# Altium PCB PCB.PcbDoc (part 2 of 2)
Units mm, origin at the board's own origin, x right, y up, seen from the top; angles counter-clockwise.
Board outline 53.59 x 68.71 mm, 2 copper layers (Top Layer, Bottom Layer), stack 1.571 mm thick; 66 components, 64 nets, 259 pads, 241 vias.
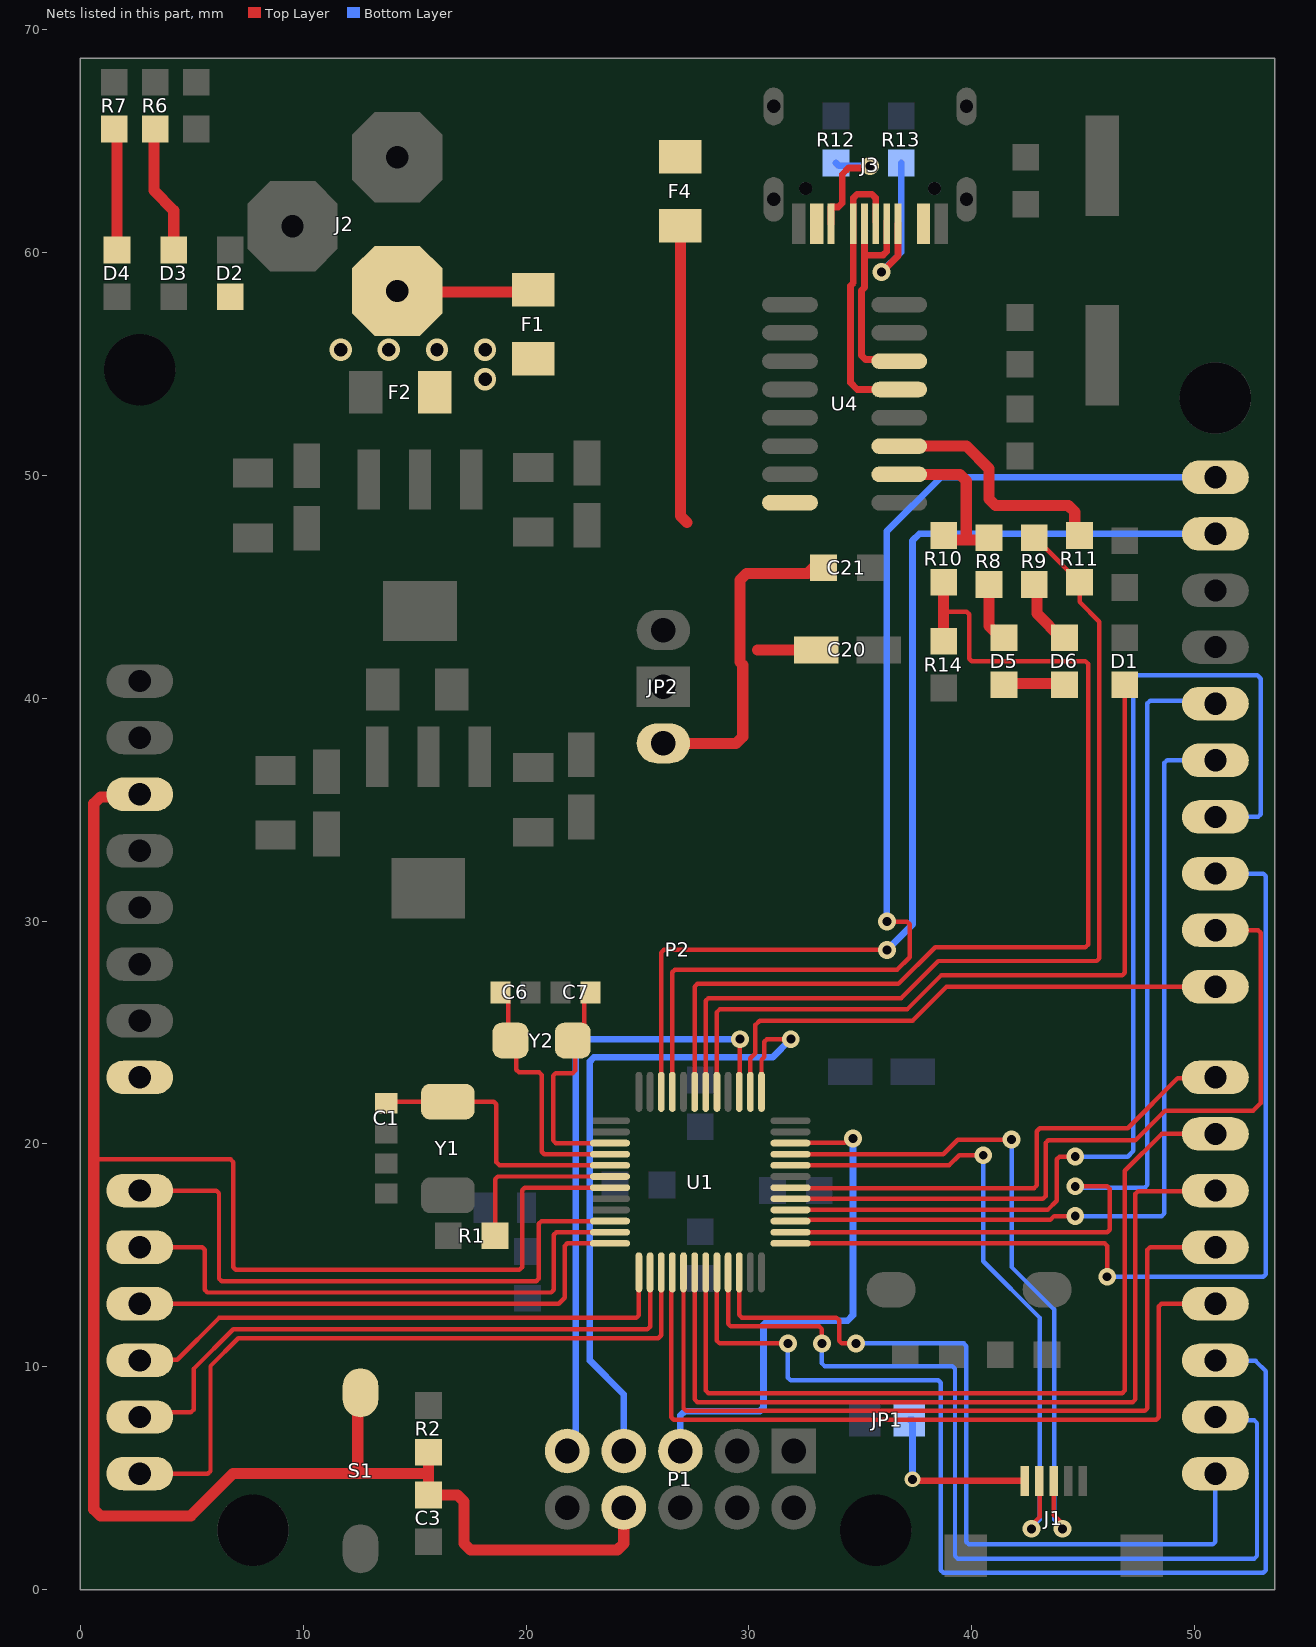
[diagram p2: the nets of this part, all layers, seen from the top]

## Via types
v1: diameter 0.8, hole 0.5, Top Layer to Bottom Layer, tented both sides, 129 vias
v2: diameter 1, hole 0.6, Top Layer to Bottom Layer, tented both sides, 63 vias
v3: diameter 0.7, hole 0.4, Top Layer to Bottom Layer, tented both sides, 26 vias
v4: diameter 0.8, hole 0.4, Top Layer to Bottom Layer, tented both sides, 21 vias
v5: diameter 0.8, hole 0.8, Top Layer to Bottom Layer, tented both sides, 2 vias

## Nets (pads, with @x,y where several pads share a name; then routed paths per layer and width w, separated by ;. In a path a pad name is that pad's centre, name@x,y a point inside that pad or via, vN(x,y) a via of type N, cw(c..) or ccw(c..) an arc to the next point about the centre after c; other vN are vias at no path point) (continued)
NetD3_2: D3.2 R6.2 | length 5.8
  Top Layer w0.5: R6.2@3.302,65.537 3.302,62.772 4.191,61.883 D3.2@4.191,60.105
NetD4_2: D4.2 R7.2 | length 5.5
  Top Layer w0.5: R7.2@1.524,65.532 1.651,65.405 D4.2@1.651,60.055
NetD5_2: D5.2 R8.2 | length 2.8
  Top Layer w0.5: R8.2@40.767,45.099 40.767,44.963 40.767,43.233 41.344,42.656 D5.2@41.444,42.656
NetD6_2: D6.2 R9.2 | length 2.9
  Top Layer w0.5: R9.2@42.799,44.963 42.915,44.847 42.915,43.794 44.054,42.656 D6.2@44.154,42.656
NetF1_1: F1.1 J2.1 | length 6.1
  Top Layer w0.5: J2.1@14.224,58.271 14.28,58.215 20.274,58.215 F1.1@20.32,58.169
NetF4_1: F4.1 J3.A4_B9 J3.B4_A9
NetJ1_1: J1.1 JP1.1 | length 7.9
  Top Layer w0.3: v3(37.338,4.953) 37.338,4.882 J1.1@42.375,4.882
  Bottom Layer w0.3: JP1.1@37.195,7.62 37.338,7.62 v3(37.338,4.953)
NetJ3_A5: J3.A5 R13.2 | length 7.8
  Top Layer w0.3: v4(35.941,59.116) 35.964,59.116 36.683,59.834 J3.A5@36.683,61.284
  Bottom Layer w0.3: v4(35.941,59.116) 36.83,60.005 R13.2@36.83,64.013
NetJ3_A6: J3.A6 J3.B6 U4.5 | length 12.8
  Top Layer w0.3: J3.A6@35.683,61.384 35.683,62.435 35.507,62.611 34.859,62.611 34.683,62.435 34.683,58.631 34.552,58.5 34.552,54.155 34.859,53.848 U4.5@36.74,53.848
NetJ3_A7: J3.A7 J3.B7 U4.6 | length 10.3
  Top Layer w0.3: J3.A7@35.183,61.384 35.183,59.866 ; 35.993,59.866 35.183,59.866 ; 35.994,59.866 35.997,59.867 36,59.868 36.004,59.87 36.009,59.873 36.016,59.877 36.025,59.884 36.04,59.898 36.183,60.041 J3.B7@36.183,61.384 ; U4.6@36.74,55.118 36.663,55.195 35.228,55.195 35.052,55.37 35.052,58.293 35.183,58.424 35.183,59.866
NetJ3_B5: J3.B5 R12.2 | length 5.6
  Top Layer w0.3: J3.B5@33.683,61.284 33.683,62.034 34.007,62.034 34.183,62.209 34.183,63.503 34.466,63.785 35.337,63.785 v4(35.433,63.881)
  Bottom Layer w0.3: R12.2@33.909,64.013 34.041,63.881 v4(35.433,63.881)
NetR8_1: R8.1 R10.1 U4.2 | length 7.8
  Top Layer w0.5: U4.2@36.74,50.038 37.344,50.038 39.458,50.038 39.751,49.745 39.751,47.101 ; R10.1@38.735,47.101 39.751,47.101 ; R8.1@40.767,47.101 39.751,47.101
NetR11_1: R11.1 U4.3 | length 11
  Top Layer w0.5: U4.3@36.74,51.308 37.344,51.308 39.751,51.308 40.767,50.292 40.767,48.934 41.06,48.641 44.325,48.641 44.617,48.348 44.617,47.515 R11.1@44.831,47.301
OSC32_IN: C6.1 U1.4 Y2.1 | length 11.6
  Top Layer w0.2: C6.1@18.843,26.797 19.193,26.447 19.193,24.746 19.565,24.374 19.565,23.327 19.682,23.21 20.584,23.21 20.701,23.093 20.701,19.655 20.818,19.538 U1.4@23.763,19.538
OSC32_OUT: C7.1 U1.3 Y2.2 | length 10.5
  Top Layer w0.2: C7.1@22.9,26.797 22.606,26.503 22.606,25.143 Y2.2@22.101,24.638 22.215,24.524 22.215,23.295 22.098,23.178 21.326,23.178 21.209,23.06 21.209,20.155 21.326,20.038 U1.3@23.763,20.038
OSC_IN: C1.1 U1.5 Y1.1 | length 12.8
  Top Layer w0.2: C1.1@13.73,21.826 13.8,21.896 Y1.1@16.489,21.896 18.552,21.896 18.669,21.779 18.669,19.177 18.808,19.038 U1.5@23.763,19.038
OSC_OUT: R1.1 U1.6 | length 7.7
  Top Layer w0.2: R1.1@18.61,15.875 18.61,18.421 18.727,18.538 U1.6@23.763,18.538
PA0: P2.AD1 U1.10 | length 27.6
  Top Layer w0.2: P2.AD1@2.667,17.907 6.106,17.907 6.223,17.79 6.223,13.96 6.34,13.843 20.457,13.843 20.574,13.96 20.574,16.421 20.691,16.538 U1.10@23.763,16.538
PA1: P2.AD2 U1.11 | length 25.6
  Top Layer w0.2: P2.AD2@2.667,15.367 5.471,15.367 5.588,15.25 5.588,13.452 5.705,13.335 21.128,13.335 21.245,13.452 21.245,15.921 21.362,16.038 U1.11@23.763,16.038
PA2: P2.AD3 U1.12 | length 23.6
  Top Layer w0.2: P2.AD3@2.667,12.827 21.463,12.827 21.73,13.094 21.73,15.421 21.847,15.538 U1.12@23.763,15.538
PA3: P2.AD4 U1.13 | length 25.2
  Top Layer w0.2: P2.AD4@2.667,10.287 2.699,10.319 4.35,10.319 6.223,12.192 24.946,12.192 25.063,12.309 U1.13@25.063,14.238
PA4: P2.AD5 U1.14 | length 28.1
  Top Layer w0.2: P2.AD5@2.667,7.747 2.886,7.966 4.963,7.966 5.08,8.083 5.08,9.906 6.858,11.684 25.446,11.684 25.563,11.801 U1.14@25.563,14.238
PA5: P2.AD6 U1.15 | length 31.5
  Top Layer w0.2: P2.AD6@2.667,5.207 5.725,5.207 5.842,5.324 5.842,10.033 7.093,11.284 25.927,11.284 26.063,11.42 U1.15@26.063,14.238
PA6: P2.IOL4 U1.16 | length 36.1
  Top Layer w0.2: U1.16@26.563,14.238 26.563,13.461 26.513,13.411 26.513,7.737 26.63,7.62 48.27,7.62 48.387,7.737 48.387,12.71 48.504,12.827 P2.IOL4@50.927,12.827
PA7: P2.IOL5 U1.17 | length 37.2
  Top Layer w0.2: U1.17@27.063,14.238 27.063,8.137 27.18,8.02 47.762,8.02 47.879,8.137 47.879,15.25 47.996,15.367 P2.IOL5@50.927,15.367
PA8: P2.IOH2 U1.29 | length 34
  Top Layer w0.2: U1.29@31.863,17.538 43.19,17.538 43.307,17.655 43.307,20.046 43.424,20.163 47.341,20.163 48.675,21.497 52.622,21.497 52.959,21.834 52.959,29.474 52.842,29.591 P2.IOH2@50.927,29.591
PA9: P2.IOL8 U1.30 | length 22.5
  Top Layer w0.2: U1.30@31.898,18.019 42.79,18.019 42.907,18.136 42.907,20.565 43.043,20.701 46.99,20.701 49.244,22.955 50.895,22.955 P2.IOL8@50.927,22.987
PA15: P2.IOH1 U1.38 | length 24.4
  Top Layer w0.2: U1.38@30.063,22.338 30.063,23.84 30.291,24.068 30.291,25.338 30.48,25.527 37.338,25.527 38.862,27.051 P2.IOH1@50.927,27.051
PB0: P2.IOL6 U1.18 | length 38.4
  Top Layer w0.2: U1.18@27.563,14.238 27.563,8.537 27.68,8.42 47.222,8.42 47.339,8.537 47.339,17.758 47.456,17.875 50.895,17.875 P2.IOL6@50.927,17.907
PB1: P2.IOL7 U1.19 | length 38.8
  Top Layer w0.2: U1.19@28.063,14.238 28.063,8.937 28.18,8.82 46.746,8.82 46.863,8.937 46.863,18.796 48.514,20.447 P2.IOL7@50.927,20.447
PB2: P2.IOL3 U1.20 | length 49.3
  Top Layer w0.2: U1.20@28.563,14.238 28.563,11.166 28.68,11.049 v4(31.75,11.049)
  Bottom Layer w0.2: v4(31.75,11.049) 31.75,9.515 31.867,9.398 38.491,9.398 38.608,9.281 38.608,0.879 38.725,0.762 53.077,0.762 53.194,0.879 53.194,9.798 52.727,10.265 50.949,10.265 P2.IOL3@50.927,10.287
PB5: D1.1 U1.41 | length 35.5
  Top Layer w0.2: U1.41@28.563,22.338 28.563,25.918 28.68,26.035 37.094,26.035 38.618,27.559 46.746,27.559 46.863,27.676 D1.1@46.863,40.606
PB6: R9.1 R11.2 U1.42 | length 42.6
  Top Layer w0.2: U1.42@28.063,22.338 28.063,26.426 28.18,26.543 36.83,26.543 38.493,28.206 45.603,28.206 45.72,28.323 45.72,43.434 44.831,44.323 R11.2@44.831,45.201 43.333,46.699 43.299,46.699 R9.1@42.799,47.199
PB7: R10.2 R14.2 U1.43 | length 47
  Top Layer w0.2: U1.43@27.563,22.338 27.563,27.061 27.68,27.178 36.703,27.178 38.354,28.829 45.095,28.829 45.212,28.946 45.212,41.539 45.095,41.656 39.995,41.656 39.878,41.773 39.878,43.761 39.761,43.878 38.735,43.878
  Top Layer w0.5: R14.2@38.735,42.556 38.735,43.878 R10.2@38.735,45.201
PB8: P2.IOH10 U1.45 | length 52.1
  Top Layer w0.2: U1.45@26.563,22.338 26.563,27.696 26.68,27.813 36.645,27.813 37.211,28.379 37.211,29.855 37.094,29.972 v4(36.195,29.972)
  Bottom Layer w0.3: v4(36.195,29.972) 36.178,29.989 36.178,47.481 38.608,49.911 P2.IOH10@50.927,49.911
PB9: P2.IOH9 U1.46 | length 49
  Top Layer w0.2: U1.46@26.063,22.338 26.063,28.585 26.18,28.702 v4(36.195,28.702)
  Bottom Layer w0.3: v4(36.195,28.702) 37.338,29.845 37.338,47.068 37.641,47.371 P2.IOH9@50.927,47.371
PB10: P2.IOL2 U1.21 | length 44.2
  Top Layer w0.2: U1.21@29.063,14.238 29.063,11.928 29.18,11.811 33.157,11.811 33.274,11.694 v4(33.274,11.049)
  Bottom Layer w0.2: v4(33.274,11.049) 33.274,10.15 33.391,10.033 39.126,10.033 39.243,9.916 39.243,1.514 39.36,1.397 52.677,1.397 52.794,1.514 52.794,7.478 52.677,7.595 51.079,7.595 P2.IOL2@50.927,7.747
PB11: P2.IOL1 U1.22 | length 36.3
  Top Layer w0.2: U1.22@29.563,14.238 29.563,12.328 29.68,12.211 33.926,12.211 34.043,12.094 34.043,11.166 34.161,11.049 v4(34.798,11.049)
  Bottom Layer w0.2: v4(34.798,11.049) 39.634,11.049 39.751,10.932 39.751,2.149 39.868,2.032 50.81,2.032 50.927,2.149 P2.IOL1@50.927,5.207
PB12: P2.IOH3 U1.25 | length 43
  Top Layer w0.2: U1.25@31.863,15.538 45.955,15.538 46.073,15.421 v4(46.073,14.04)
  Bottom Layer w0.2: v4(46.073,14.04) 53.077,14.04 53.194,14.157 53.194,32.014 53.077,32.131 P2.IOH3@50.927,32.131
PB13: P2.IOH6 U1.26 | length 45.7
  Top Layer w0.2: U1.26@31.863,16.038 46.075,16.038 46.192,16.155 46.192,17.98 46.075,18.098 v4(44.639,18.098)
  Bottom Layer w0.2: v4@44.831,18.034 47.752,18.034 47.879,18.161 47.879,39.761 47.996,39.878 50.8,39.878 P2.IOH6@50.927,39.751
PB14: P2.IOH5 U1.27 | length 39.5
  Top Layer w0.2: U1.27@31.863,16.538 32.64,16.538 32.69,16.588 43.512,16.588 43.688,16.764 v4@44.669,16.764
  Bottom Layer w0.2: v4(44.639,16.764) 48.524,16.764 48.641,16.881 48.641,37.094 48.758,37.211 P2.IOH5@50.927,37.211
PB15: P2.IOH4 U1.28 | length 52.8
  Top Layer w0.2: U1.28@31.863,17.038 43.396,17.038 43.815,17.457 43.815,19.314 43.932,19.431 v4(44.639,19.431)
  Bottom Layer w0.2: v4(44.639,19.431) 46.99,19.431 47.244,19.685 47.244,40.904 47.361,41.021 52.813,41.021 52.959,40.875 52.959,34.788 52.842,34.671 P2.IOH4@50.927,34.671
Reset: C3.1 P1.8 P2.POW3 R2.1 S1.2 U1.7 | length 99.5
  Top Layer w0.2: 0.606,19.304 6.741,19.304 6.858,19.187 6.858,14.468 6.975,14.351 19.703,14.351 19.82,14.468 19.82,17.921 19.938,18.038 U1.7@23.763,18.038
  Top Layer w0.5: P2.POW3@2.667,35.687 2.54,35.56 0.899,35.56 0.606,35.267 0.606,19.304 0.606,3.595 0.899,3.302 4.953,3.302 6.858,5.207 15.621,5.207 ; 12.458,5.322 12.446,5.334 12.446,8.707 S1.2@12.573,8.834 ; R2.1@15.621,6.166 15.621,5.207 ; P1.8@24.384,3.683 24.384,2.071 24.091,1.778 17.505,1.778 17.213,2.071 17.213,3.958 16.92,4.25 C3.1@15.621,4.25 15.621,5.207
SWCLK: P1.7 U1.37 | length 31.1
  Top Layer w0.2: U1.37@30.563,22.338 30.563,23.774 30.691,23.902 30.691,24.583 30.808,24.7 v4(31.877,24.7)
  Bottom Layer w0.3: P1.7@24.384,6.223 24.384,8.763 22.86,10.287 22.86,23.706 23.036,23.882 31.059,23.882 v4(31.877,24.7)
SWDIO: P1.5 U1.34 | length 24.2
  Top Layer w0.2: U1.34@31.863,20.038 31.877,20.052 34.3,20.052 34.371,20.123 34.556,20.123 v4(34.671,20.238)
  Bottom Layer w0.3: P1.5@26.924,6.223 26.924,7.825 27.1,8.001 30.48,8.001 30.656,8.177 30.656,11.889 30.831,12.065 34.417,12.065 34.671,12.319 v4(34.671,20.238)
SWO: P1.9 U1.39 | length 28.3
  Top Layer w0.2: U1.39@29.563,22.338 29.577,22.352 29.577,24.751 v4@29.591,24.765
  Bottom Layer w0.3: P1.9@21.844,6.223 21.844,6.683 22.225,7.064 22.225,24.524 22.401,24.7 v4(29.591,24.7)
USB_DN: J1.2 U1.32 | length 29.1
  Top Layer w0.2: U1.32@31.863,19.038 38.977,19.038 38.989,19.05 38.991,19.05 39.434,19.493 v4(40.513,19.493) ; v4(42.672,2.732) 42.672,2.894 43.039,3.261 43.039,4.868 J1.2@43.025,4.882
  Bottom Layer w0.2: v4(40.513,19.493) 40.509,19.489 40.509,14.736 43.053,12.192 43.053,3.149 42.672,2.768 v4(42.672,2.732)
USB_DP: J1.3 U1.33 | length 30.9
  Top Layer w0.2: U1.33@31.863,19.538 38.715,19.538 39.37,20.193 v4(41.783,20.193) ; J1.3@43.675,4.882 43.675,3.35 44.069,2.956 v4@44.069,2.794
  Bottom Layer w0.2: v4(41.783,20.193) 41.783,14.478 43.688,12.573 43.688,3.149 44.069,2.768 v4(44.069,2.732)
Vin: D2.1 F1.2 F2.1 P2.POW8
  other v2: 18.161,54.31 11.684,55.626 13.843,55.626 16.002,55.626 18.161,55.626
Vusb: C20.1 C21.1 D5.1 D6.1 F4.2 JP2.3 U4.16 | length 33.5
  Top Layer w0.5: JP2.3@26.162,37.973 29.425,37.973 29.718,38.266 29.718,41.49 29.591,41.617 29.591,45.3 29.884,45.593 32.636,45.593 C21.1@33.017,45.974 ; F4.2@26.924,61.338 26.797,61.211 26.924,61.084 26.924,48.172 27.217,47.879 ; 30.392,42.164 C20.1@33.014,42.164 ; D5.1@41.444,40.656 D6.1@44.154,40.656
pads on no net: J1.4 J3. P1.1 P1.3 P1.4 P1.6 P2.H1 P2.H2 P2.H3 P2.H4 P2.POW1 P2.POW2 U1.2 U1.40 U4.9 U4.10 U4.11 U4.12 U4.13 U4.14 U4.15
copper on no net:
  other v5: 41.675,3.674 45.675,3.674

## Polygon pours and split planes (outlines as drawn)
GND on Top Layer "GND_L01_P000" (solid, remove dead copper, pour order 0): 53.34,68.326 0.168,68.326 0.168,0 53.594,0
GND on Bottom Layer "GND_L02_P002" (solid, remove dead copper, pour order 2): 53.332,68.317 0.16,68.317 0.16,-0.009 53.586,-0.009

## Keep-outs
Keep-Out Layer:
  the board outline again, w0.2

## Other copper
Top Layer:
  region net NetF4_1: 33.655,64.516 36.83,64.516 cw(c36.83,64.135) 37.211,64.135 37.211,60.706 38.123,60.706 38.123,62.173 cw(c38.123,62.577) 37.719,62.577 37.719,65.024 ccw(c37.338,65.024) 37.338,65.405 25.908,65.405 25.908,63.754 32.639,63.754 cw(c32.639,63.246) 33.147,63.246 33.147,62.484 cw(c32.999,62.484) 33.04,62.342 ccw(c33.147,61.976) 32.766,61.976 32.766,61.462 33.318,61.462 33.318,64.179 cw(c33.655,64.179)
  region net +3.3: 38.227,30.353 40.64,30.353 ccw(c40.64,30.734) 41.021,30.734 41.021,32.385 ccw(c40.64,32.385) 40.64,32.766 23.749,32.766 cw(c23.749,33.401) 23.114,33.401 23.114,35.306 ccw(c22.86,35.306) 22.86,35.56 19.812,35.56 ccw(c19.812,35.306) 19.558,35.306 19.558,35.052 cw(c19.304,35.052) 19.304,34.798 16.51,34.798 cw(c16.51,35.052) 16.256,35.052 16.256,38.735 ccw(c16.002,38.735) 16.002,38.989 15.24,38.989 ccw(c15.24,38.735) 14.986,38.735 14.986,31.75 16.637,31.75 16.637,32.893 cw(c16.891,32.893) 16.891,33.147 18.923,33.147 cw(c18.923,32.258) 19.812,32.258 19.812,31.877 ccw(c20.701,31.877) 20.701,30.988 37.592,30.988 cw(c37.592,30.734) 37.846,30.734 ccw(c38.227,30.734)
  region net GND: 17.018,36.322 ccw(c17.223,36.322) 17.223,36.117 19.861,36.117 19.812,36.068 23.114,36.068 cw(c23.114,35.56) 23.622,35.56 23.622,34.036 ccw(c24.13,34.036) 24.13,33.528 41.275,33.528 cw(c41.275,33.147) 41.656,33.147 41.656,30.607 ccw(c41.91,30.607) 41.91,30.353 44.45,30.353 ccw(c44.45,30.607) 44.704,30.607 44.704,35.799 ccw(c44.308,35.799) 44.308,36.195 25.019,36.195 cw(c25.019,36.703) 24.511,36.703 24.511,37.211 ccw(c23.749,37.211) 23.749,37.973 19.05,37.973 cw(c19.05,38.227) 18.796,38.227 18.796,38.608 ccw(c18.542,38.608) 18.542,38.862 17.272,38.862 ccw(c17.272,38.608) 17.018,38.608
  region net Vusb: 25.146,36.957 29.718,36.957 ccw(c29.718,37.338) 30.099,37.338 30.099,38.227 cw(c30.29,38.289) 30.228,38.481 41.656,38.481 ccw(c41.656,38.862) 42.037,38.862 42.037,40.513 40.894,40.513 40.894,39.878 cw(c40.64,39.878) 40.64,39.624 30.607,39.624 cw(c30.607,40.132) 30.099,40.132 30.099,40.767 cw(c30.48,40.767) 30.48,41.148 33.909,41.148 ccw(c33.909,41.402) 34.163,41.402 34.163,42.418 ccw(c33.528,42.418) 33.528,43.053 30.607,43.053 cw(c30.607,43.561) 30.099,43.561 30.099,43.942 cw(c30.861,43.942) 30.861,44.704 34.163,44.704 34.163,47.244 ccw(c33.655,47.244) 33.655,47.752 33.401,47.752 cw(c33.401,48.387) 32.766,48.387 32.766,48.895 ccw(c32.512,48.895) 32.512,49.149 30.861,49.149 ccw(c30.861,48.895) 30.607,48.895 30.607,48.133 cw(c30.226,48.133) 30.226,47.752 28.321,47.752 cw(c28.321,48.26) 27.813,48.26 27.813,61.849 ccw(c27.432,61.849) 27.432,62.23 26.216,62.23 ccw(c26.216,61.795) 25.781,61.795 25.781,45.72 ccw(c26.289,45.72) 26.289,45.212 27.94,45.212 cw(c27.94,44.704) 28.448,44.704 28.448,39.624 cw(c27.94,39.624) 27.94,39.116 25.273,39.116 ccw(c25.273,38.608) 24.765,38.608 24.765,37.338 ccw(c25.146,37.338)
  region net GND: 35.179,39.878 39.243,39.878 39.243,41.021 37.846,41.021 cw(c37.846,41.275) 37.592,41.275 37.592,41.909 ccw(c37.589,41.909) 37.592,41.91 37.592,47.625 cw(c38.227,47.625) 38.227,48.26 ccw(c38.227,48.514) 38.481,48.514 38.481,48.895 ccw(c38.227,48.895) 38.227,49.149 34.544,49.149 cw(c34.544,49.53) 34.163,49.53 34.163,59.436 ccw(c33.655,59.436) 33.655,59.944 32.893,59.944 cw(c32.893,60.325) 32.512,60.325 32.512,62.23 32.004,62.23 cw(c32.004,62.484) 31.75,62.484 31.75,63.119 ccw(c31.496,63.119) 31.496,63.373 28.956,63.373 ccw(c28.956,62.865) 28.448,62.865 28.448,59.563 ccw(c29.464,59.563) 29.464,58.547 30.732,58.547 cw(c30.733,58.538) 30.734,58.547 33.02,58.547 cw(c33.02,58.166) 33.401,58.166 33.401,48.768 ccw(c33.909,48.768) 33.909,48.26 34.417,48.26 cw(c34.417,47.879) 34.798,47.879 34.798,41.91 34.798,40.259 ccw(c35.179,40.259)
  region net GND: 44.196,67.056 47.371,67.056 cw(c47.371,66.548) 47.879,66.548 47.879,41.91 ccw(c48.387,41.91) 48.387,41.402 52.07,41.402 ccw(c52.07,41.91) 52.578,41.91 52.578,42.672 ccw(c52.07,42.672) 52.07,43.18 49.53,43.18 cw(c49.53,43.688) 49.022,43.688 49.022,67.945 ccw(c48.641,67.945) 48.641,68.326 6.604,68.326 0.889,68.326 0.889,67.056 6.604,67.056 6.604,62.611 8.128,62.611 8.128,59.563 ccw(c8.636,59.563) 8.636,59.055 10.287,59.055 ccw(c10.287,59.436) 10.668,59.436 10.668,62.484 cw(c11.176,62.484) 11.176,62.992 21.209,62.992 21.844,62.992 cw(c21.844,62.23) 22.606,62.23 22.606,53.213 cw(c21.971,53.213) 21.971,52.578 17.399,52.578 ccw(c17.399,51.689) 16.51,51.689 16.51,49.403 ccw(c16.891,49.403) 16.891,49.022 24.13,49.022 ccw(c24.13,49.657) 24.765,49.657 24.765,65.151 cw(c25.273,65.151) 25.273,65.659 39.243,65.659 39.243,62.484 cw(c38.989,62.484) 38.989,62.23 38.354,62.23 38.354,60.325 40.64,60.325 ccw(c40.64,60.833) 41.148,60.833 41.148,62.992 cw(c41.402,62.992) 41.402,63.246 43.307,63.246 ccw(c43.307,63.754) 43.815,63.754 43.815,66.675 cw(c44.196,66.675)
  region net +5R: 14.605,43.815 15.875,43.815 15.875,45.085 cw(c16.256,45.085) 16.256,45.466 18.796,45.466 cw(c18.796,44.958) 19.304,44.958 19.304,43.434 ccw(c20.701,43.434) 20.701,42.037 27.051,42.037 ccw(c27.051,42.545) 27.559,42.545 27.559,43.688 ccw(c26.924,43.688) 26.924,44.323 25.781,44.323 cw(c25.781,45.339) 24.765,45.339 24.765,46.355 ccw(c23.331,46.355) 23.331,47.789 19.304,47.789 19.177,47.752 16.51,47.752 cw(c16.51,48.387) 15.875,48.387 15.875,51.435 14.605,51.435 14.605,45.466
  region net GND: 4.699,34.798 ccw(c5.207,34.798) 5.207,34.29 6.096,34.29 cw(c6.096,33.782) 6.604,33.782 6.604,33.274 ccw(c6.985,33.274) 6.985,32.893 9.398,32.893 ccw(c9.398,33.147) 9.652,33.147 9.652,33.655 cw(c10.033,33.655) 10.033,34.036 11.303,34.036 ccw(c11.303,34.29) 11.557,34.29 11.557,35.052 ccw(c11.295,35.052) 11.295,35.314 10.422,35.314 ccw(c10.422,35.189) 10.296,35.188 cw(c10.16,35.188) 10.16,35.052 7.493,35.052 cw(c7.493,35.433) 7.112,35.433 7.112,37.719 cw(c7.366,37.719) 7.366,37.973 8.382,37.973 ccw(c8.382,38.227) 8.636,38.227 8.636,39.37 ccw(c8.382,39.37) 8.382,39.624 4.953,39.624 ccw(c4.953,39.37) 4.699,39.37
  region net GND: 10.922,48.76 10.922,43.942 cw(c9.906,43.942) 9.906,42.926 2.286,42.926 cw(c2.286,43.815) 1.397,43.815 1.397,46.355 cw(c2.667,46.355) 2.667,47.625 8.255,47.625 ccw(c8.255,48.244) 8.874,48.244 cw(c9.39,48.244) 9.39,48.76
  region net +5: 1.143,29.591 ccw(c1.397,29.591) 1.397,29.337 9.017,29.337 cw(c9.017,29.083) 9.271,29.083 ccw(c9.652,29.083) 9.273,29.045 9.271,29.045 9.271,28.702 ccw(c9.525,28.702) 9.525,28.448 12.827,28.448 ccw(c12.827,28.702) 13.081,28.702 13.081,30.48 ccw(c12.573,30.48) 12.573,30.988 4.572,30.988 cw(c4.572,31.242) 4.318,31.242 4.318,31.369 ccw(c4.064,31.369) 4.064,31.623 1.397,31.623 ccw(c1.397,31.369) 1.143,31.369
  region net +3.3: 5.715,32.893 5.715,33.528 ccw(c5.207,33.528) 5.207,34.036 1.524,34.036 ccw(c1.524,33.655) 1.143,33.655 1.143,32.766 ccw(c1.651,32.766) 1.651,32.258 4.572,32.258 cw(c4.572,31.877) 4.953,31.877 ccw(c5.461,31.877) 5.461,31.369 17.225,31.369 17.225,32.512 6.096,32.512 cw(c6.096,32.893)
  region net Vin: 14.605,52.578 16.637,52.578 16.637,53.086 cw(c17.145,53.086) 17.145,53.594 21.082,53.594 ccw(c21.082,54.102) 21.59,54.102 21.59,56.261 15.24,56.261 ccw(c15.239,55.762) 15.138,56.251 15.139,56.261 7.874,56.261 cw(c7.874,56.769) 7.366,56.769 7.366,58.555 5.969,58.555 5.969,55.372 ccw(c6.223,55.372) 6.223,55.118 14.605,55.118
  region net NetC12_1: 13.97,54.355 13.97,49.294 cw(c13.589,49.294) 13.589,48.913 12.319,48.913 cw(c12.319,49.294) 11.938,49.294 ccw(c11.557,49.294) 11.557,49.675 9.29,49.675 ccw(c9.29,49.275) 8.89,49.275 8.89,49.167 6.985,49.167 6.985,51.054 cw(c7.511,51.054) 7.511,51.58 10.051,51.58 ccw(c10.051,52.324) 10.795,52.324 10.795,54.104 cw(c11.442,54.104) 11.446,54.752 13.588,54.739 cw(c13.586,54.355)
  region net NetC16_1: 14.527,41.386 12.811,41.386 ccw(c12.811,40.894) 12.319,40.894 12.319,38.227 cw(c11.811,38.227) 11.811,37.719 8.128,37.719 ccw(c8.128,37.211) 7.62,37.211 7.62,35.433 9.652,35.433 9.652,35.687 cw(c10.033,35.687) 10.033,36.068 13.839,36.068 ccw(c13.839,36.677) 14.448,36.667
  region net +5: 15.621,41.094 15.621,39.878 ccw(c16.002,39.878) 16.002,39.497 27.432,39.497 27.432,41.529 16.056,41.529 ccw(c16.056,41.094)
  region net NetF1_1: 21.082,59.817 11.938,59.817 ccw(c11.938,59.277) 11.398,59.277 11.398,57.721 ccw(c12.351,57.721) 12.351,56.769 21.431,56.769 21.431,59.468 ccw(c21.082,59.468)
Bottom Layer:
  region net Vin: 19.939,31.623 32.512,31.623 ccw(c32.512,32.512) 33.401,32.512 33.401,55.753 ccw(c32.893,55.753) 32.893,56.261 11.557,56.261 ccw(c11.556,55.881) 11.176,55.88 11.176,55.372 ccw(c11.557,55.372) 11.557,54.991 14.224,54.991 cw(c14.224,54.61) 14.605,54.61 14.605,52.959 ccw(c14.986,52.959) 14.986,52.578 16.383,52.578 ccw(c16.383,52.832) 16.637,52.832 16.637,53.086 cw(c17.145,53.086) 17.145,53.594 21.336,53.594 ccw(c21.336,53.848) 21.59,53.848 21.59,54.737 cw(c21.844,54.737) 21.844,54.991 30.607,54.991 cw(c30.607,54.483) 31.115,54.483 31.115,34.29 cw(c30.353,34.29) 30.353,33.528 18.669,33.528 ccw(c18.669,32.639) 17.78,32.639 17.78,25.273 cw(c17.018,25.273) 17.018,24.511 9.906,24.511 ccw(c9.906,24.13) 9.525,24.13 cw(c9.271,24.13) 9.271,23.876 1.651,23.876 ccw(c1.651,23.368) 1.143,23.368 1.143,22.606 ccw(c1.651,22.606) 1.651,22.098 9.652,22.098 ccw(c9.652,22.606) 10.16,22.606 cw(c10.668,22.606) 10.668,23.114 19.05,23.114 ccw(c19.05,24.003) 19.939,24.003
  region net GND: 1.524,25.019 15.113,25.019 ccw(c15.113,27.051) 17.145,27.051 17.145,33.274 cw(c18.542,33.274) 18.542,34.671 23.368,34.671 cw(c23.368,34.417) 23.622,34.417 23.622,34.036 ccw(c23.876,34.036) 23.876,33.782 30.099,33.782 ccw(c30.099,34.036) 30.353,34.036 30.353,34.925 30.353,35.941 ccw(c30.099,35.941) 30.099,36.195 25.019,36.195 cw(c25.019,36.703) 24.511,36.703 24.511,37.211 ccw(c23.749,37.211) 23.749,37.973 14.859,37.973 ccw(c14.859,37.211) 14.097,37.211 14.097,28.575 cw(c13.208,28.575) 13.208,27.686 9.652,27.686 cw(c9.652,28.702) 8.636,28.702 8.636,46.99 ccw(c8.001,46.99) 8.001,47.625 4.953,47.625 cw(c4.953,48.514) 4.064,48.514 4.064,49.657 cw(c4.572,49.657) 4.572,50.165 9.906,50.165 ccw(c9.906,50.927) 10.668,50.927 10.668,58.928 10.668,62.484 cw(c11.176,62.484) 11.176,62.992 21.209,62.992 cw(c21.209,61.849) 22.352,61.849 22.352,59.182 ccw(c23.114,59.182) 23.114,58.42 33.782,58.42 ccw(c33.782,58.801) 34.163,58.801 34.163,59.69 ccw(c33.782,59.69) 33.782,60.071 25.4,60.071 cw(c25.4,60.706) 24.765,60.706 24.765,67.818 ccw(c24.257,67.818) 24.257,68.326 9.017,68.326 ccw(c9.017,67.691) 8.382,67.691 8.382,51.943 2.54,51.943 ccw(c2.54,51.054) 1.651,51.054 1.651,43.561 ccw(c2.286,43.561) 2.286,42.926 4.445,42.926 cw(c4.445,42.418) 4.953,42.418 4.953,29.591 cw(c4.191,29.591) 4.191,28.829 1.524,28.829 ccw(c1.524,28.448) 1.143,28.448 1.143,25.4 ccw(c1.524,25.4)
  region net +3.3: 40.005,24.638 36.195,24.638 ccw(c36.195,24.003) 35.56,24.003 35.56,22.479 33.528,22.479 33.528,25.781 cw(c34.29,25.781) 34.29,26.543 36.957,26.543 ccw(c36.957,27.432) 37.846,27.432 37.846,32.258 cw(c38.227,32.258) 38.227,32.639 40.64,32.639 cw(c40.64,32.258) 41.021,32.258 41.021,25.654 cw(c40.005,25.654)
  region net GND: 44.704,32.131 44.704,23.622 cw(c43.561,23.622) 43.561,22.479 36.322,22.479 36.322,23.876 41.148,23.876 ccw(c41.148,24.384) 41.656,24.384 41.656,32.258 cw(c42.164,32.258) 42.164,32.766 44.069,32.766 cw(c44.069,32.131)
  region net +5: 13.081,28.702 13.081,38.481 cw(c14.097,38.481) 14.097,39.497 27.178,39.497 ccw(c27.178,39.878) 27.559,39.878 27.559,41.148 ccw(c27.178,41.148) 27.178,41.529 11.176,41.529 ccw(c11.176,40.259) 9.906,40.259 9.906,31.242 cw(c9.652,31.242) 9.652,30.988 9.525,30.988 ccw(c9.525,30.734) 9.271,30.734 9.271,28.702 ccw(c9.525,28.702) 9.525,28.448 12.827,28.448 ccw(c12.827,28.702)
  pour cut-out: 10.109,28.702 11.621,28.702 10.16,28.702 cw(c10.16,28.956) 10.109,28.707

## Silkscreen, mask and mechanical layers (free items; w line width, h text height)
Top Overlay:
  lines w0.2: 1.27,53.086 1.945,53.086 ; 1.524,56.769 7.62,56.769 7.62,53.086 3.389,53.086 ; 5.588,52.832 5.588,53.086 ; 6.731,56.769 6.731,57.023
  lines w0.3: 37.719,37.226 40.259,37.226 ; 37.719,39.243 40.259,39.243 ; 42.638,39.243 42.892,39.243 ; 42.672,37.226 42.926,37.226 ; 45.305,39.243 45.559,39.243 ; 45.339,37.226 45.593,37.226 ; 48.099,39.243 48.929,39.243 ; 48.133,37.226 48.964,37.226
  text "3V3" at 0.979,64.487 h2 r270
  text "5V0" at 3.524,64.487 h2 r270
  text "VIN" at 6.042,64.485 h2 r270
  text "PB8" at 45.285,51.022 h2
  text "PB9" at 45.285,48.736 h2
  text "5V0" at 28.035,44.25 h2 r270
  text "USB" at 28.035,40.059 h2 r270
  text ">RXD" at 40.84,39.424 h2 r270
  text "<TXD" at 43.507,39.424 h2 r270
  text "PB5" at 46.196,39.424 h2 r270
  text "PB13" at 32.966,38.83 h2
  text "PB14" at 32.966,36.649 h2
  text "RST" at 4.518,35.606 h1.7
  text "PB15" at 45.041,33.952 h2
  text "3.3" at 4.518,32.607 h2
  text "PB12" at 45.041,31.46 h2
  text "+5" at 4.518,30.016 h2
  text "PA8" at 45.041,28.991 h2
  text "GND" at 4.518,27.386 h2
  text "PA15" at 45.041,26.455 h2
  text "GND" at 4.518,24.756 h2
  text "PA9" at 44.904,22.447 h2
  text "Vin" at 4.52,22.171 h2
  text "PB1" at 44.904,19.855 h2
  text "PA0" at 4.645,17.367 h2
  text "PB0" at 44.904,17.335 h2
  text "PA10" at 37.665,15.843 h2
  text "PA1" at 4.645,14.805 h2
  text "PA7" at 44.904,14.678 h2
  text "PA2" at 4.645,12.265 h2
  text "PA6" at 44.904,12.267 h2
  text "STLINK V3 MINIE" at 16.837,10.001 h2
  text "PA3" at 4.645,9.747 h2
  text "PB2" at 44.904,9.741 h2
  text "PB10" at 44.904,7.237 h2
  text "PA4" at 4.645,7.185 h2
  text "RESET" at 10.065,4.772 h2 r90
  text "PA5" at 4.645,4.667 h2
  text "PB11" at 49.222,0.708 h2
Bottom Overlay:
  text "STM32F103C8 / eBoard V1.0" at 22.733,21.59 h2.5
  text "github.com/aKaReZa75" at 22.533,20.134 h2

## Text inside footprints (layer, text, board x,y; h text height)
J3: Mechanical 13 "PCB EDGE" at 30.734,68.529 h0.61 r180
P1: Top Overlay "2" at 34.712,4.433 h0.8 r180; Top Overlay "1" at 34.212,6.973 h0.8 r180; Top Overlay "10" at 20.136,4.433 h0.8 r180; Top Overlay "9" at 20.136,6.973 h0.8 r180